# Allegro board hmc5883.brd
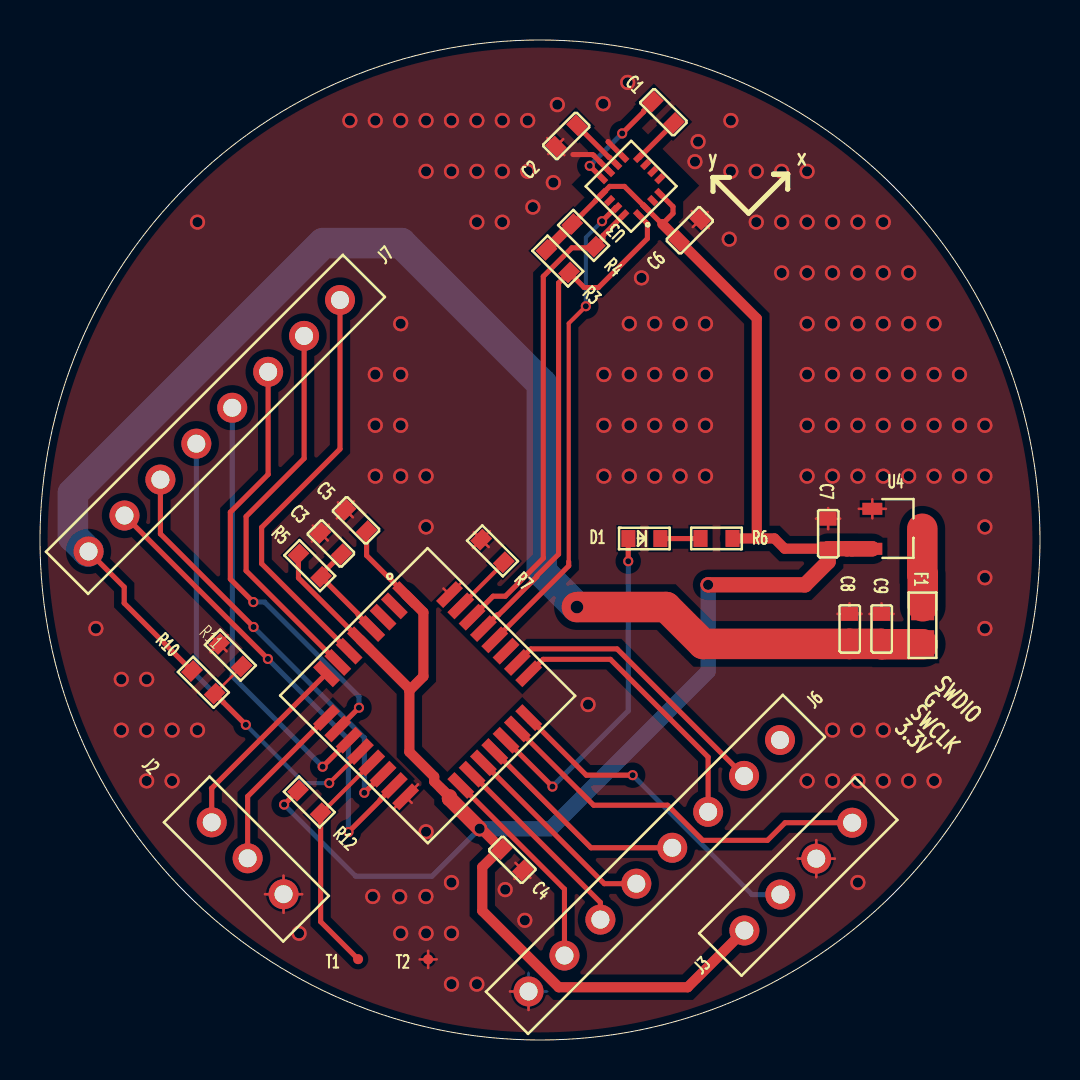
[diagram p0: board, top side]
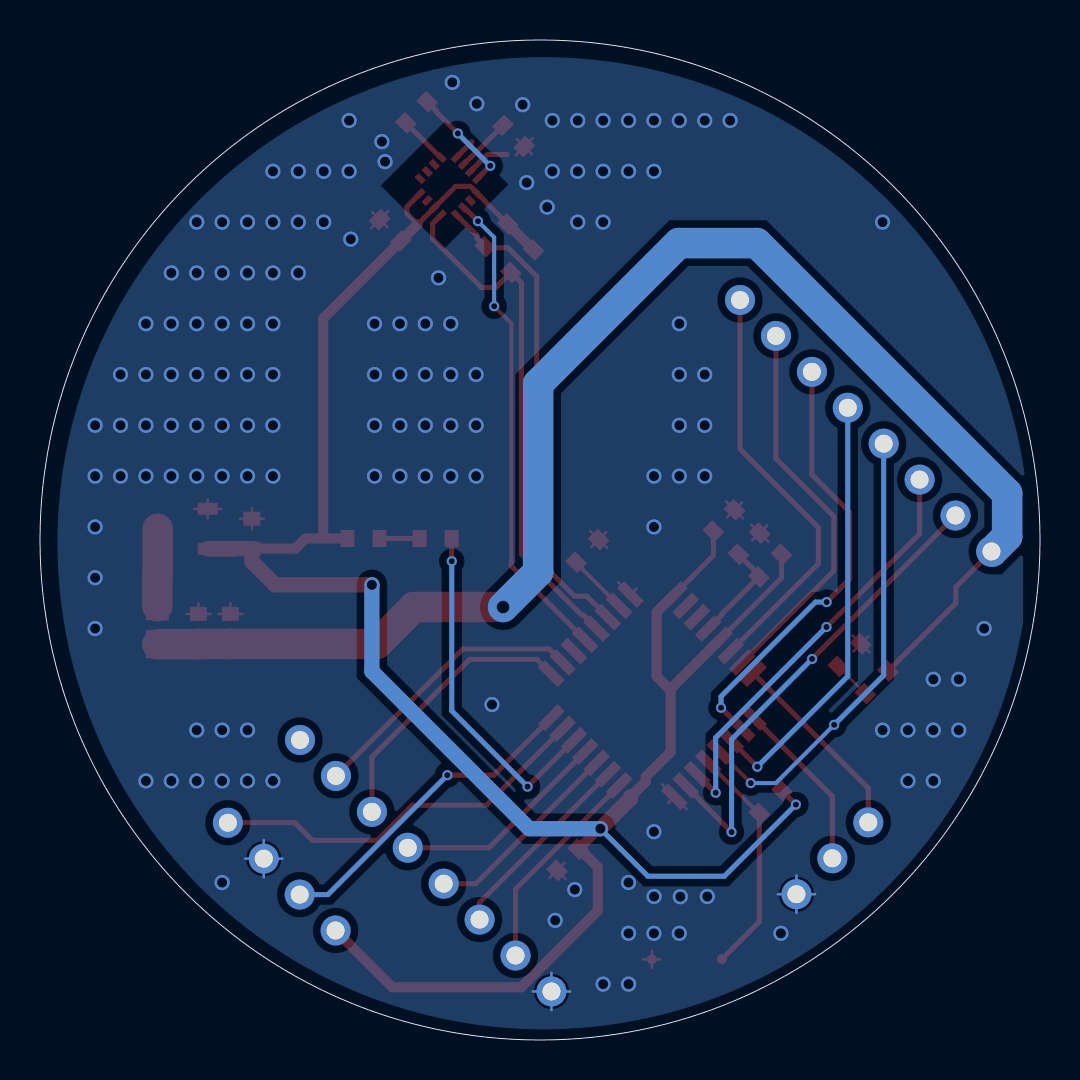
[diagram p1: board, bottom side, seen from below]

Outline 50 x 50 mm; copper layers: TOP, BOTTOM. Coordinates in mm from the lower left corner of the outline.
Outline path: circle c25,25 r25

## Placement (name value [footprint] x y rotation side)
C1  0.22uF  [C0603]  31.7 45.85 135 top
C2  4.7uF  [C0603]  26.85 45.73 225 top
C3  0.1uF  [C0603]  15.08 24.29 135 top
C4  0.1uF  [C0603]  23.09 9.54 315 top
C5  10uF  [C0603]  16.33 25.45 135 top
C6  0.1uF  [C0603]  31.95 39.96 45 top
C7  10uF  [C0603]  39.41 24.57 90 top
C8  10uF  [C0603]  40.48 19.8 90 top
C9  10uF  [C0603]  42.08 19.8 90 top
D1  LED  [LED0603]  29.42 25.07 0 top
F1  FUSE  [R0805]  44.14 19.79 90 top
J2  -  [CON3]  8.59 10.88 315 top
J3  -  [CON4]  35.22 5.47 45 top
J6  -  [CON8]  37 15 225 top
J7  -  [CON8]  15 37 225 top
R3  10K  [R0603]  26.45 38.38 135 top
R4  10K  [R0603]  26.61 40.8 315 top
R5  10K  [R0603]  12.92 24.29 315 top
R6  1K  [R0603]  34.63 25.08 180 top
R7  10K  [R0603]  23.19 23.89 135 top
R10  30K  [R0603]  8.73 17.32 135 top
R11  10K  [R0603]  8.96 19.81 315 top
R12  10K  [R0603]  14.03 11.33 135 top
T1  TEST  [TP1]  15.9 4.04 0 top
T2  TEST  [TP1]  19.41 4.03 0 top
U2  STM32F051K8T6  [LQFP-32]  19.38 17.22 225 top
U3  -  [HMC5883]  29.56 42.69 135 top
U4  X6206P25  [SOT23-3]  41.31 24.2 0 top

## Library data of the parts
C1-C9 = CAP NP
D1 = LED
F1 = FUSE
J2 = CON3
J3 = CON4
J6 J7 = CON8
R3-R7 R10-R12 = RESISTOR
T1 T2 = TEST
U2 = STM32F051K8T6
U3 = HMC5883
U4 = X6206P25

## Footprints (pads in the part's own frame, mm; a bottom-side part is the same pattern mirrored in y, then rotated)
C0603
  rect 0.7x0.85 smd: 1(0,0) 2(1.5,0)
CON3
  round 1.5 hole 0.9: 1(0,0) 2(2.54,0) 3(5.08,0)
CON4
  round 1.5 hole 0.9: 1(0,0) 2(2.54,0) 3(5.08,0) 4(7.62,0)
CON8
  round 1.5 hole 0.9: 1(0,0) 2(2.54,0) 3(5.08,0) 4(7.62,0) 5(10.16,0) 6(12.7,0) 7(15.24,0) 8(17.78,0)
HMC5883
  rect 0.5x0.3 smd: 1(-1.272,0.75) 2(-1.272,0.25) 3(-1.272,-0.25) 4(-1.272,-0.75) 9(1.275,-0.75) 10(1.275,-0.25) 11(1.275,0.25) 12(1.275,0.75)
  rect 0.3x0.5 smd: 5(-0.75,-1.275) 6(-0.25,-1.275) 7(0.25,-1.275) 8(0.75,-1.275) 13(0.75,1.275) 14(0.25,1.275) 15(-0.25,1.275) 16(-0.75,1.275)
LED0603
  rect 0.7x0.85 smd: 1(0,0) 2(1.6,0)
LQFP-32
  rect 0.5x1.4 smd: 1(-2.8,-4.35) 2(-2,-4.35) 3(-1.2,-4.35) 4(-0.4,-4.35) 5(0.4,-4.35) 6(1.2,-4.35) 7(2,-4.35) 8(2.8,-4.35) 17(2.8,4.35) 18(2,4.35) 19(1.2,4.35) 20(0.4,4.35) 21(-0.4,4.35) 22(-1.2,4.35) 23(-2,4.35) 24(-2.8,4.35)
  rect 1.4x0.5 smd: 9(4.35,-2.8) 10(4.35,-2) 11(4.35,-1.2) 12(4.35,-0.4) 13(4.35,0.4) 14(4.35,1.2) 15(4.35,2) 16(4.35,2.8) 25(-4.35,2.8) 26(-4.35,2) 27(-4.35,1.2) 28(-4.35,0.4) 29(-4.35,-0.4) 30(-4.35,-1.2) 31(-4.35,-2) 32(-4.35,-2.8)
R0603
  rect 0.7x0.85 smd: 1(0,0) 2(1.6,0)
R0805
  rect 1.4x1.15 smd: 1(0,0) 2(1.9,0)
SOT23-3
  rect 1x0.6 smd: 1(0.303,2.36) 2(0.303,0.36) 3(2.803,1.36)
TP1
  round 0.5 smd: 1(0,0)

## Nets
GND: C2.2 C3.2 C4.2 C5.2 C6.2 C7.2 C8.2 C9.2 J2.3 J3.3 J6.8 R7.2 R11.1 T2.1(TP) U2.16(VSS#16) U2.32(VSS#32) U3.9(GND#9) U3.11(GND#11) U4.1(VSS)
VBAT_ADC: J7.5 R10.1 R11.2 U2.12(PA6)
VCC: C8.1 C9.1 F1.1 J7.8 R10.2
VCC_2.3V: C4.1 C5.1 C6.1 C7.1 J3.1 R3.2 R4.1 R5.1 R6.1 R12.2 U2.1(VDD#1) U2.5(VDDA) U2.17(VDD#17) U3.2(VDD) U3.4(S1) U3.13(VDDIO) U4.2(VOUT)
GPS_EN: J6.3 U2.25(PA15)
GSM_PWR_EN: J6.1
INT0: U2.28(PB5) U3.15(DRDY)
KEY: R12.1 T1.1(TP) U2.13(PA7)
NC2: U3.7(NC2)
PA0: J7.1 U2.6(PA0)
PA1: J7.2 U2.7(PA1)
PA4: J7.3 U2.10(PA4)
PA5: J7.4 U2.11(PA5)
PA8: J6.7 U2.18(PA8)
PA11: J6.4 U2.21(PA11)
PB0: J7.6 U2.14(PB0)
PB1: J7.7 U2.15(PB1)
PB4: U2.27(PB4)
PF0-OSC-IN: U2.2(PF0-OSC-IN)
PF1-OSC-OUT: U2.3(PF1-OSC-OUT)
PWR_CTRL: J6.2 U2.26(PB3)
RXD1: J6.6 U2.19(PA9)
RXD2: J2.2 U2.9(PA3)
SCL: R3.1 U2.29(PB6) U3.1(SCL)
SDA: R4.2 U2.30(PB7) U3.16(SDA)
SWCLK: J3.2 U2.24(PA14)
SWDIO: J3.4 U2.23(PA13)
TXD1: J6.5 U2.20(PA10)
TXD2: J2.1 U2.8(PA2)
N01018: C1.1 U3.8(STEP)
N01088: C1.2 U3.12(SETC)
N01266: C2.1 U3.10(C1)
N10026: C3.1 R5.2 U2.4(NRST)
N11155: D1.2(ANODE) R6.2
N11673: D1.1(CATHODE) U2.22(PA12)
N11939: R7.1 U2.31(BOOT0)
N14419: F1.2 U4.3(VIN)

Pads without a net: U3 3 5 6 14

## Via types
v1: diameter 0.508, hole 0.305, TOP to BOTTOM, 17 vias
v2: diameter 0.762, hole 0.508, TOP to BOTTOM, 137 vias
v3: diameter 1.016, hole 0.635, TOP to BOTTOM, 1 via

## Routing (per net, layer and track width the routed paths; a pad name or vN(x,y) marks a point on that pad's centre or on a via; arc(x,y) is an arc through that point)
GND: length 52.9
  TOP w0.127: 21.63,24.59 R7.2 ; R7.2 21.69,25.39 ; R7.2 22.43,24.65 ; R7.2 22.49,25.45 ; C7.2 40.01,26.07 ; C7.2 38.8,26.07 ; C7.2 39.41,26.6 ; C7.2 39.41,25.54 ; 12.18,6.36 J2.3 ; J2.3 12.18,8.22 ; J2.3 13.11,7.29 ; J2.3 11.25,7.29 ; 38.81,8.14 J3.3 ; J3.3 37.88,9.07 ; J3.3 39.74,9.07 ; J3.3 38.81,9.99 ; C9.2 42.08,21.83 ; C9.2 41.47,21.3 ; C9.2 42.68,21.3 ; 24.43,1.5 J6.8 23.5,2.43 ; 8.58,20.18 R11.1 ; R11.1 9.33,19.44 ; R11.1 8.53,19.38 ; R11.1 9.38,20.24 ; 18.98,4.03 T2.1 ; T2.1 19.83,4.03 ; T2.1 19.41,3.6 ; T2.1 19.41,4.46 ; 25.36,45.1 C2.2 ; C2.2 26.16,45.04 ; C2.2 26.21,44.24 ; C2.2 25.41,44.3 ; C8.2 41.08,21.3 ; C8.2 39.88,21.3 ; C8.2 40.48,21.83 ; 13.59,24.92 C3.2 ; C3.2 14.44,25.77 ; C3.2 14.39,24.97 ; C3.2 13.64,25.72 ; C5.2 15.64,26.13 ; C5.2 14.84,26.08 ; C5.2 14.9,26.88 ; C5.2 15.7,26.93 ; 21.1,22.89 U2.32 20.17,22.57 ; 23.72,8.06 C4.2 ; C4.2 24.52,8.11 ; C4.2 23.77,8.85 ; 41.61,26.08 U4.1 ; U4.1 40.94,26.56 ; U4.1 41.61,27.04 ; U4.1 42.29,26.56 ; U2.16 18.9,12.78 ; U2.16 17.66,11.54 ; U2.16 18.59,11.86 ; 32.59,41.45 C6.2 ; C6.2 33.44,40.59 ; C6.2 32.64,40.65 ; C6.2 33.39,41.39
  TOP w0.254: U3.9 28.41,44.91 28.41,44.92 ; 27.99,43.92 28.48,43.43 U3.11 27.99,43.91 27.99,43.92 ; 27.99,43.92 27.7,44.22 27.69,44.22 27.63,44.27 26.65,44.27
  BOTTOM w0.127: 38.81,8.14 J3.3 ; J3.3 39.74,9.07 ; J3.3 37.88,9.07 ; J3.3 38.81,9.99 ; 24.43,1.5 J6.8 ; J6.8 25.36,2.43 ; J6.8 24.43,3.36 ; J6.8 23.5,2.43 ; 12.18,6.36 J2.3 ; J2.3 11.25,7.29 ; J2.3 13.11,7.29 ; J2.3 12.18,8.22
  vias: v2(2.79,20.57) v2(4.06,18.03) v2(4.06,15.49) v2(5.33,18.03) v2(5.33,15.49) v2(5.33,12.95) v2(6.6,15.49) v2(6.6,12.95) v2(7.87,40.89) v2(7.87,15.49) v2(12.95,5.33) v2(15.49,45.97) v2(16.64,7.18) v2(16.76,45.97) v2(16.76,33.27) v2(16.76,30.73) v2(16.76,28.19) v2(18.03,45.97) v2(18.03,35.81) v2(18.03,33.27) v2(18.03,30.73) v2(18.03,28.19) v2(17.98,7.16) v2(18.03,5.33) v2(19.3,45.97) v2(19.3,43.43) v2(19.3,28.19) v2(19.3,25.65) v2(19.3,10.41) v2(19.3,7.18) v2(19.3,5.33) v2(20.57,45.97) v2(20.57,43.43) v2(20.57,7.87) v2(20.57,5.33) v2(20.57,2.79) v2(21.84,45.97) v2(21.84,43.43) v2(21.84,40.89) v2(21.84,2.79) v2(23.11,45.97) v2(23.11,43.43) v2(23.11,40.89) v2(23.26,7.52) v2(24.24,5.98) v2(24.38,45.97) v2(24.38,43.43) v2(24.64,41.65) v2(25.67,42.87) v2(25.87,46.77) v2(27.4,16.77) v2(28.16,46.81) v2(28.19,33.27) v2(28.19,30.73) v2(28.19,28.19) v2(29.39,47.88) v2(29.46,35.81) v2(29.46,33.27) v2(29.46,30.73) v2(29.46,28.19) v2(30.08,38.11) v2(30.73,35.81) v2(30.73,33.27) v2(30.73,30.73) v2(30.73,28.19) v2(32,35.81) v2(32,33.27) v2(32,30.73) v2(32,28.19) v2(32.75,43.92) v2(32.9,44.92) v2(33.27,35.81) v2(33.27,33.27) v2(33.27,30.73) v2(33.27,28.19) v2(34.54,45.97) v2(34.54,43.43) v2(34.46,40.04) v2(35.81,43.43) v2(35.81,40.89) v2(37.08,43.43) v2(37.08,40.89) v2(37.08,38.35) v2(38.35,43.43) v2(38.35,40.89) v2(38.35,38.35) v2(38.35,35.81) v2(38.35,33.27) v2(38.35,30.73) v2(38.35,28.19) v2(38.35,12.95) v2(39.62,40.89) v2(39.62,38.35) v2(39.62,35.81) v2(39.62,33.27) v2(39.62,30.73) v2(39.62,28.19) v2(39.62,15.49) v2(39.62,12.95) v2(40.89,40.89) v2(40.89,38.35) v2(40.89,35.81) v2(40.89,33.27) v2(40.89,30.73) v2(40.89,28.19) v2(40.89,15.49) v2(40.89,12.95) v2(40.89,7.87) v2(42.16,40.89) v2(42.16,38.35) v2(42.16,35.81) v2(42.16,33.27) v2(42.16,30.73) v2(42.16,28.19) v2(42.16,15.49) v2(42.16,12.95) v2(43.43,38.35) v2(43.43,35.81) v2(43.43,33.27) v2(43.43,30.73) v2(43.43,28.19) v2(43.43,12.95) v2(44.7,35.81) v2(44.7,33.27) v2(44.7,30.73) v2(44.7,28.19) v2(44.7,12.95) v2(45.97,33.27) v2(45.97,30.73) v2(45.97,28.19) v2(47.24,30.73) v2(47.24,28.19) v2(47.24,25.65) v2(47.24,23.11) v2(47.24,20.57)
VBAT_ADC: length 26.8
  TOP w0.127: R10.1 10.09,18.67 R11.2
  TOP w0.203: U2.12 16.02,14.4 v1(14.46,12.84)
  TOP w0.254: R10.1 9.16,16.89 v1(10.29,15.76)
  BOTTOM w0.203: v1(10.29,15.76) 13.21,12.84 v1(14.46,12.84)
  BOTTOM w0.254: v1(10.29,15.76) 7.82,18.24 J7.5
VCC: length 72.9
  TOP w0.254: J7.8 4.21,22.65 4.21,21.84 R10.2
  TOP w1.524: F1.1 42.09,19.79 C9.1 40.48,19.8 C8.1 33.15,19.8 31.31,21.65 v3(26.85,21.65)
  BOTTOM w1.524: J7.8 2.39,24.43 1.64,25.17 1.64,27.33 14.16,39.85 18.06,39.85 25.09,32.81 25.09,23.4 v3(26.85,21.65)
VCC_2.3V: length 123.4
  TOP w0.254: U3.4 31.65,41.67 31.65,41.33 31.12,40.8 31.1,40.8 U3.2 29.22,42.68 28.48,42.68 U3.13 27.77,41.97 27.77,41.95 R4.1 ; U2.5 12.92,23.11 R5.1 ; R12.2 v1(12.21,11.77) ; U2.17 20.48,12.07 ; C5.1 16.33,24.22 17.43,23.12 U2.1 18.28,22.27
  TOP w0.508: 18.47,17.48 19.17,18.18 19.17,21.39 18.28,22.27 ; 18.47,17.48 18.47,17.56 U2.5 ; 18.47,17.48 18.47,14.41 19.71,13.16 19.71,12.92 20.47,12.16 ; J3.1 32.38,2.64 25.93,2.64 22.11,6.46 22.11,8.64 23.01,9.54 C4.1 22.06,10.57 v2(21.98,10.57) ; 35.84,25.08 36.72,25.08 37.23,24.57 C7.1 ; 35.84,25.08 35.84,36.07 C6.1 31.12,40.8 ; 35.84,25.08 R6.1 ; 25.33,39.51 R3.2 25.33,39.51 ; 25.33,39.51 R4.1
  TOP w0.762: 40.34,24.57 C7.1 39.41,23.91 38.25,22.76 v2(33.41,22.76) ; 40.34,24.57 40.35,24.56 U4.2 40.61,24.56 40.6,24.57 40.34,24.57 ; 20.47,12.16 20.48,12.07 v2(21.98,10.57)
  BOTTOM w0.254: v2(21.98,10.57) 19.6,8.19 15.79,8.19 v1(12.21,11.77)
  BOTTOM w0.762: v2(33.41,22.76) 33.41,18.43 25.54,10.57 v2(21.98,10.57)
GPS_EN: length 14
  TOP w0.254: U2.25 25.16,19.03 28.52,19.03 33.41,14.14 J6.3
INT0: length 24.2
  TOP w0.203: v1(27.29,36.69) 26.44,35.83 26.44,23.91
  TOP w0.254: v1(28.1,40.94) 28.78,41.62 U3.15 ; 26.44,23.91 26.44,23.71 U2.28
  BOTTOM w0.203: v1(28.1,40.94) 27.29,40.13 v1(27.29,36.69)
KEY: length 11.7
  TOP w0.203: U2.13 14.06,11.33 R12.1
  TOP w0.254: T1.1 14.03,5.91 R12.1
PA0: length 21
  TOP w0.254: U2.6 11.08,23.82 11.08,25.63 15,29.55 J7.1
PA1: length 19.4
  TOP w0.254: U2.7 10.31,23.46 10.31,26.18 13.2,29.07 J7.2
PA4: length 22.1
  TOP w0.254: v1(10.67,21.9) 9.52,23.05 9.52,26.39 11.41,28.28 J7.3 ; U2.10 v1(15.95,16.61)
  BOTTOM w0.254: v1(15.95,16.61) 15.95,17.17 11.23,21.9 v1(10.67,21.9)
PA5: length 21.7
  TOP w0.254: 15.45,14.99 U2.11 15.45,14.99 ; 15.45,14.99 v1(14.13,13.66)
  BOTTOM w0.254: v1(14.13,13.66) 9.61,18.18 J7.4
PA8: length 10.6
  TOP w0.254: U2.18 26.22,7.54 J6.7
PA11: length 10.9
  TOP w0.254: J6.4 27.55,9.61 U2.21
PB0: length 22.5
  TOP w0.254: J7.6 6.02,25.31 v1(10.68,20.65) ; U2.14 17.15,13.29 v1(16.21,12.36) 16.22,12.36 U2.14
  BOTTOM w0.254: v1(16.21,12.36) 16.21,15.11 v1(10.68,20.65)
PB1: length 23.7
  TOP w0.254: v1(15.42,10.4) 17.01,11.98 17.01,12.02 U2.15 ; J7.7 v1(11.4,19.05)
  BOTTOM w0.254: v1(11.4,19.05) 15.42,15.03 v1(15.42,10.4)
PWR_CTRL: length 14.2
  TOP w0.254: U2.26 24.54,19.55 28.86,19.55 J6.2
RXD1: length 9.9
  TOP w0.254: J6.6 28.02,6.88 U2.19
RXD2: length 8.7
  TOP w0.254: U2.9 10.38,12.18 J2.2
SCL: length 26.3
  TOP w0.203: 29.93,41.26 U3.1
  TOP w0.254: U3.1 29.93,41.26 30.37,40.82 30.37,40.07 27.92,37.62 27.21,37.62 R3.1 ; R3.1 25.93,37.85 25.93,24.29 24.84,23.21 24.84,23.17 22.92,21.25 22.85,21.25 U2.29 ; R3.1 26.5,38.38
SDA: length 24.3
  TOP w0.254: U2.30 22.66,22.19 23.27,22.19 25.16,24.09 25.16,38.18 26.6,39.61 27.69,39.61 R4.2 28.15,40.07 28.15,40.22 U3.16
SWCLK: length 16.2
  TOP w0.254: v1(29.63,13.24) 27.31,13.24 U2.24
  BOTTOM w0.254: v1(29.63,13.24) 35.6,7.27 J3.2
SWDIO: length 19.4
  TOP w0.254: U2.23 27.68,11.74 31.38,11.74 33.14,9.98 36.37,9.98 37.25,10.86 J3.4
TXD1: length 10.1
  TOP w0.254: U2.20 28.21,7.82 J6.5
TXD2: length 9.8
  TOP w0.254: U2.8 14.31,18.31 8.57,12.58 8.59,12.56 J2.1
N01018: length 2.5
  TOP w0.254: U3.8 29.98,44.13 C1.1
N01088: length 5.4
  TOP w0.254: v1(29.11,45.33) 30.19,46.41 30.19,46.46 C1.2 ; U3.12 v1(27.49,43.71)
  BOTTOM w0.254: v1(27.49,43.71) v1(29.11,45.33)
N01266: length 2.8
  TOP w0.254: U3.10 28.48,44.13 28.45,44.13 C2.1
N10026: length 5.2
  TOP w0.254: U2.4 15.91,21.25 15.91,21.3 R5.2 14.05,23.27 C3.1
N11155: length 2
  TOP w0.254: D1.2 33.02,25.07 R6.2
N11673: length 17.3
  TOP w0.254: D1.1 29.41,25.06 v1(29.41,23.94) ; U2.22 v1(25.62,12.67)
  BOTTOM w0.254: v1(29.41,23.94) 29.41,16.46 v1(25.62,12.67)
N11939: length 3.1
  TOP w0.203: R7.1 23.19,23.86 U2.31
N14419: length 6.2
  TOP w1.27: U4.3 44.11,24.5 44.14,24.48 44.14,23.28
  TOP w1.524: F1.2 44.14,23.28 44.11,23.3 U4.3

## Copper pours and planes (outline as drawn; the poured copper is in the pictures)
GND on TOP: 0.38,25 49.62,25 ; 5 cut-outs
GND on BOTTOM: 0.56,26.18 49.09,26.15 0.84,20.89 0.84,25.96 0.58,26.23 0.58,26.2 ; 3 cut-outs

Small or netless copper shapes (teardrops, artwork), in the pictures only: 1 on TOP

## Text on the board
Ref Des/Silkscreen Top: y | x | 3.3V | SWCLK | G | SWDIO
NCLEGEND-1-2: FIGURE | SIZE | 12.0 | 20.0 | 25.0 | 35.433 | DRILL CHART: TOP to BOTTOM | ALL UNITS ARE IN MILS | PLATED | QTY | 17 | 137 | 1 | 23
